# Altium PCB 6C-2L-1550um.PcbDoc
Units mm, origin at the board's own origin, x right, y up, seen from the top; angles counter-clockwise.
Board outline 52.6 x 53.3 mm, 2 copper layers (Top Layer, Bottom Layer), stack 1.586 mm thick; 35 components, 25 nets, 138 pads, 12 vias.
Unrouted connection lines stored in the file: 55.
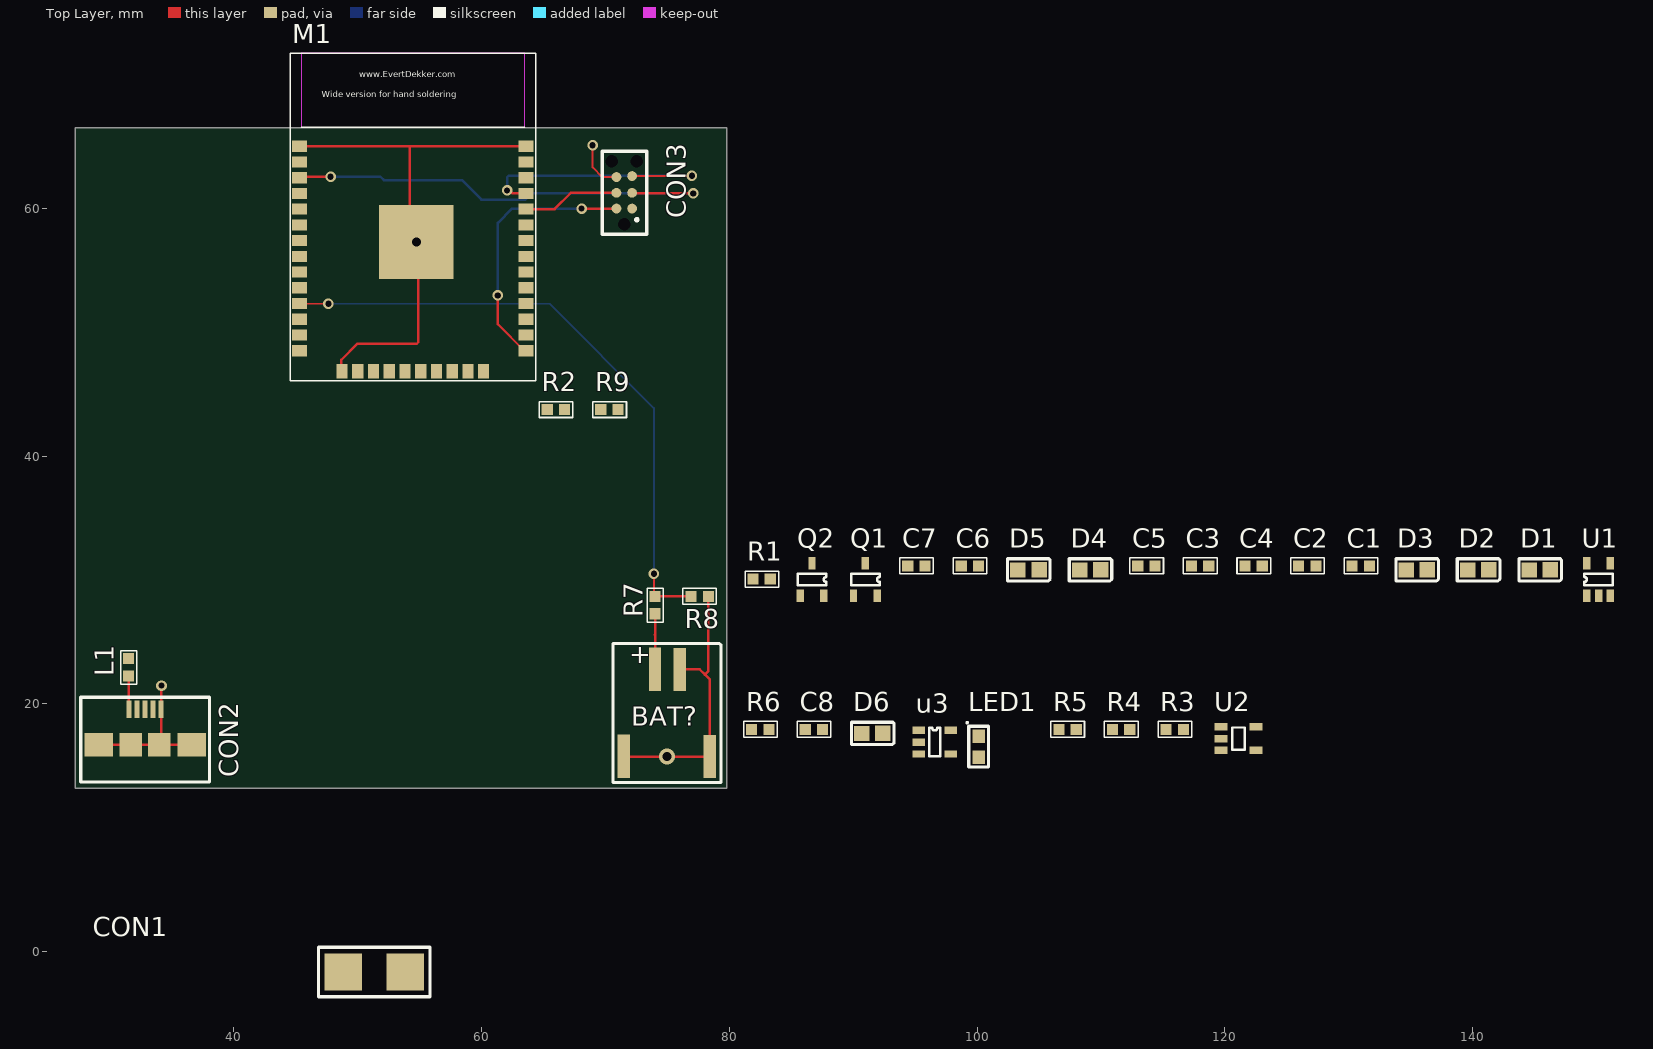
[diagram p0: Top Layer view]
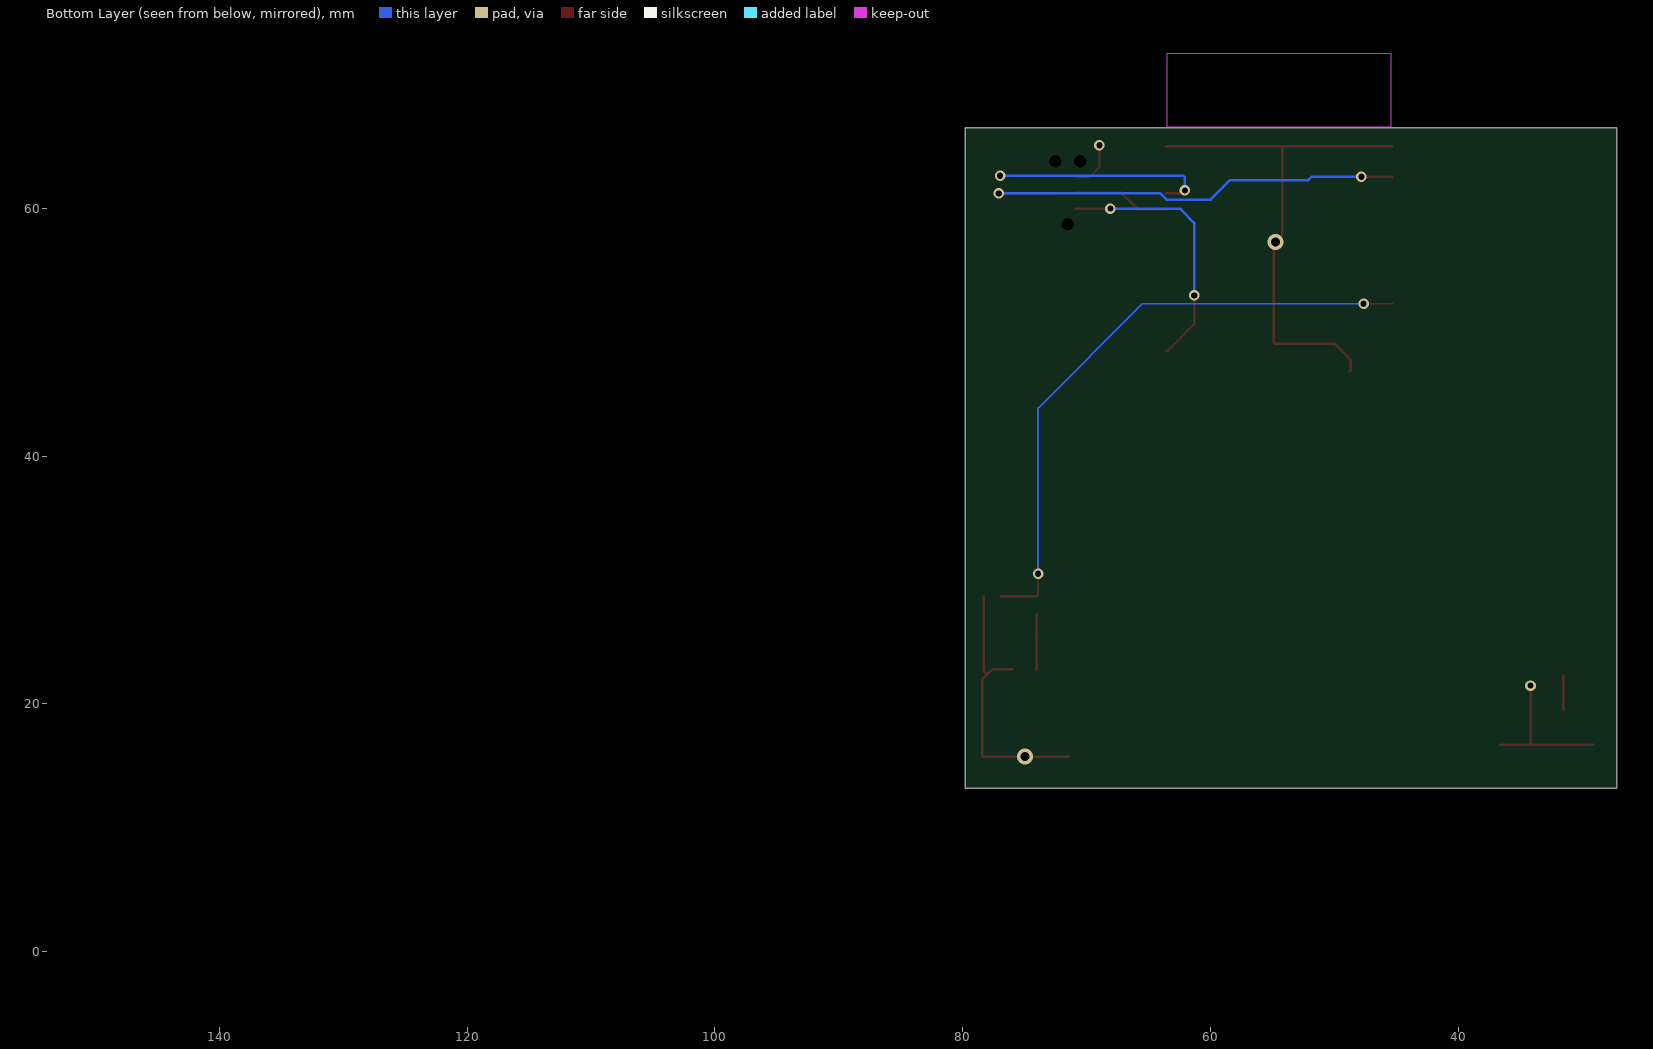
[diagram p1: Bottom Layer view, seen from below]

## Layer stack, top to bottom
Top Solder: solder mask 0.0102, Solder Resist, Dk 3.5
Top Layer: signal copper 0.018
Dielectric1: core 1.55, FR-4, Dk 4.8
Bottom Layer: signal copper 0.018
Bottom Solder: solder mask 0.0102, Solder Resist, Dk 3.5

## Board outline
27.2,13.2 27.2,66.5 79.8,66.5 79.8,13.2

## Design rules (kind name [scope] priority, off if disabled: settings)
BoardOutlineClearance [All] p1: gap=0.25 ignorepadtopadclearanceinfootprint=FALSE except(0: Arc-SplitContinuation Track-SplitContinuation SMDPad-SplitContinuation THPad-SplitContinuation Via-SplitContinuation Fill-SplitContinuation Poly-SplitContinuation Region-SplitContinuation Text-SplitContinuation)
Clearance Clearance-xPP-xTP-xTT [All] p1: gap=0.15 ignorepadtopadclearanceinfootprint=FALSE except(0: Arc-Hole Track-Hole SMDPad-Hole THPad-Hole Via-Hole Fill-Hole Poly-Hole Region-Hole Text-Hole)
ComponentClearance [All] p1: gap=0.25 collisioncheckmode=3 verticalgap=0.25 showdistances=FALSE
DiffPairsRouting [All] p1: maxlimit=0.25 minlimit=0.25 mostfreqgap=0.25 toplayer_minwidth=0.381 toplayer_maxwidth=0.381 toplayer_prefwidth=0.381 bottomlayer_minwidth=0.381 bottomlayer_maxwidth=0.381 bottomlayer_prefwidth=0.381 maxuncoupledlength=12.5
Height [All] p1: minheight=0 maxheight=25 prefheight=12.5
HoleSize HoleSize-PTH [All] p1: absolutevalues=TRUE maxlimit=2 minlimit=0.25 maxpercent=80.000 minpercent=20.000
HoleToHoleClearance [All] p1: gap=0.35 allowstackedmicrovias=TRUE
MinimumAnnularRing "Minimum IAR  >0.45mm" [((ObjectKind = 'Pad') OR (ObjectKind = 'Via')) And (Layer = 'MultiLayer') And (HoleDiameter > AsMM(0.45))] p1: minimumring=0.175 // minimum inner annular ring for pads > 0.45mm finished hole size
MinimumAnnularRing "Minimum IAR <=0.45mm" [((ObjectKind = 'Pad') OR (ObjectKind = 'Via')) And (Layer = 'MultiLayer') And (HoleDiameter <= AsMM(0.45))] p2: minimumring=0.175 // minimum inner annular ring for pads <= 0.45mm finished hole size
MinimumSolderMaskSliver [All] p1: minsoldermaskwidth=0.08
PlaneClearance PlaneClearance-IPI [All] p1: clearance=0.25
PlaneConnect [All] p1: planeconnectstyle=Relief reliefexpansion=0.175 reliefentries=4 reliefconductorwidth=0.2 reliefairgap=0.2
PolygonConnect PolygonConnect-xTW [All] p1: connectstyle=Relief reliefconductorwidth=0.2 reliefentries=4 polygonreliefangle="90 Angle" airgapwidth=0.2
RoutingCorners [All] p1: cornerstyle=45-Degree minsetback=2.5 maxsetback=2.5
RoutingVias "RoutingVias > 0.45mm" [(ObjectKind = 'Via') And (HoleDiameter > AsMM(0.45))] p1: holewidth=0.5 width=0.85 viastyle="Through Hole" minholewidth=0.5 minwidth=0.85 maxholewidth=0.9 maxwidth=1.25 // finishet hole size > 0.45mm
RoutingVias "RoutingVias <= 0.45mm" [(ObjectKind = 'Via') And (HoleDiameter <= AsMM(0.45))] p2: holewidth=0.3 width=0.65 viastyle="Through Hole" minholewidth=0.25 minwidth=0.6 maxholewidth=0.45 maxwidth=0.8 // finishet hole size <= 0.45mm
SilkToSilkClearance [All] p1: silktosilkclearance=0.2
SilkToSolderMaskClearance SilkscreenOverComponentPads [IsPad] p1: minsilkscreentomaskgap=0.2 clearancetoexposedcopper=TRUE
SolderMaskExpansion [All] p1: expansion=0 istentingtop=FALSE
UnRoutedNet [All] p1: checkbadconnections=TRUE
Width Width-xTW [All] p1: maxlimit=1.5 minlimit=0.15 preferedwidth=0.2
18 further rules are at their usual default settings.

## Classes and differential pairs
component class voeding: C1 C2 C3 C4 C5 C6 C7 CON1 D1 D2 D3 D4 D5 Q1 Q2 R1 U1
component class Designator: CON3 M1 R2 R9
component class charger: BAT? C8 CON2 D6 L1 LED1 R3 R4 R5 R6 R7 R8 U2 u3

## Components (designator, comment, footprint, x,y, rotation, side; value= is the part's Value field where it differs from the comment)
BAT? "batery" "jst 2pin" 73.975,22.775 r0 top
C1 "0,022uF" 0603 130.269,31.139 r0 top
C2 "470pF" 0603 125.943,31.139 r0 top
C3 "10uF" 0603 117.293,31.139 r0 top
C4 "10uF" 0603 121.618,31.139 r0 top
C5 "0,022uF" 0603 112.968,31.139 r0 top
C6 "47nF" 0603 98.717,31.139 r0 top
C7 "47nF" 0603 94.392,31.139 r0 top
C8 "10uF" 0603 86.116,17.938 r0 top
CON1 "screw connector" "qi coil" 48.825,-1.65 r0 top
CON2 "USB" microusb 32.825,18.125 r0 top
CON3 "Tagconnect" Tagconnect 71.479,61.254 r90 top
D1 "MBR0540-TP" Diode 145.419,30.814 r0 top
D2 "MBR0540-TP" Diode 140.444,30.814 r0 top
D3 "MBR0540-TP" Diode 135.494,30.814 r0 top
D4 "MBR0540-TP" Diode 109.118,30.814 r0 top
D5 "MBR0540-TP" Diode 104.142,30.814 r0 top
D6 "FC4SDCBMF6.0-T1" Diode 91.542,17.613 r0 top
L1 "ferite bead" 0603 31.5,23.65 r270 top
LED1 "LED" LED 100.117,16.538 r90 top
M1 "ESP32S_Module" ESP32S_W 54.444,55.935 r0 top
Q1 "2N7002ET1G" "N-channel FET" 91.067,30.039 r0 top
Q2 "2N7002ET1G" "N-channel FET" 86.766,30.039 r0 top
R1 "10K" 0603 81.9,30.075 r0 top
R2 "1k" 0603 65.291,43.763 r0 top
R3 "1k" 0603 115.243,17.938 r0 top
R4 "1k" 0603 110.918,17.938 r0 top
R5 "1k" 0603 106.592,17.938 r0 top
R6 "1k" 0603 81.791,17.938 r0 top
R7 "100K" 0603 74,28.675 r270 top
R8 "100K" 0603 78.3,28.675 r180 top
R9 "1k" 0603 69.616,43.763 r0 top
U1 "MCP1755T-500E/OT" "AP2112 sot25" 149.895,30.039 r0 top
U2 "MCP73831" MCP73831/2 121.093,17.188 r0 top
u3 "ap2112 SOT25" "AP2112 sot25" 96.575,17.175 r270 top

## Footprints (in the part's own frame and the unit in brackets; to place one, negate y for a bottom-side part, rotate by r counter-clockwise, add the part's x,y. Pads: shape width x height; smd on the part's side, far side on the other; paste and mask are expansions set on the pad)
0603 [mm]
  rect 0.9x0.9 smd: 1(0,0) 2(1.4,0)
  silkscreen extent -0.64,-0.65 2.07,0.64, body extent -0.03,-0.38 1.57,0.42, height 0.3
"AP2112 sot25" [mm]
  round 0.2 on Top Overlay: 1(-1.225,-0.55)
  rect 0.6x1 smd: 1(-0.675,-1.3) 2(0.275,-1.3) 3(1.225,-1.3) 4(1.225,1.3) 5(-0.675,1.3)
  silkscreen extent -0.87,-0.45 1.43,0.45, body extent -1.19,-1.17 1.74,1.17, height 1
Diode [mm]
  rect 1.25x1.22 smd: 1(-0.85,0)
  rect 1.25x1.25 smd: 2(0.85,0)
  silkscreen extent -1.69,-0.9 1.75,0.9
ESP32S_W [mm] "Esp32S Module wide for hand soldering"
  rect 1.2x0.9 smd: 1(-9.144,9.08) 2(-9.144,7.81) 3(-9.144,6.54) 4(-9.144,5.271) 5(-9.144,4) 6(-9.144,2.73) 7(-9.144,1.46) 8(-9.144,0.191) 9(-9.144,-1.079) 10(-9.144,-2.349) 11(-9.144,-3.619) 12(-9.144,-4.889) 13(-9.144,-6.159) 14(-9.144,-7.429) 25(9.144,-7.429) 26(9.144,-6.159) 27(9.144,-4.889) 28(9.144,-3.619) 29(9.144,-2.349) 30(9.144,-1.079) 31(9.144,0.191) 32(9.144,1.46) 33(9.144,2.73) 34(9.144,4) 35(9.144,5.271) 36(9.144,6.54) 37(9.144,7.81) 38(9.144,9.08)
  rect 0.9x1.2 smd: 15(-5.715,-9.08) 16(-4.447,-9.08) 17(-3.177,-9.08) 18(-1.907,-9.08) 19(-0.637,-9.08) 20(0.633,-9.08) 21(1.903,-9.08) 22(3.173,-9.08) 23(4.443,-9.08) 24(5.713,-9.08)
  rect 6x6 smd: 101(0.283,1.346)
  Keep-Out Layer region: -9.017,10.604 9.017,10.604 9.017,16.573 -9.017,16.573
  silkscreen extent -9.91,-9.84 9.91,16.57, body extent -8.98,-8.89 9.02,16.61, height 3.25
"jst 2pin" [mm] "jst 2 pin battery connector"
  rect 1x3.5 smd: 1(0.016,0.002) 2(-2.52,-7.01) 2(2,0) 2(4.45,-7.03)
  silkscreen extent -3.38,-9.14 5.35,2.1, body extent -3.2,-8.17 4.95,0.09, height 5.38
LED [mm]
  rect 1.1x1 smd: 1(-0.85,0) 2(0.85,0)
  silkscreen extent -1.65,-0.8 1.97,0.95, body extent -0.8,-0.4 0.8,0.4, height 0.6
MCP73831/2 [mm] "MCP73831/2 ) sot23-5"
  rect 1.05x0.6 smd: 1(-1.425,0.95) 2(-1.425,0) 3(-1.425,-0.95) 4(1.425,-0.95) 5(1.425,0.95)
  silkscreen extent -0.5,-0.9 0.5,0.9, body extent -1.6,-1.45 1.2,1.45, height 1.45
microusb [mm]
  rect 0.4x1.4 smd: 1(-1.3,1.425) 2(-0.65,1.425) 3(0,1.425) 4(0.65,1.425) 5(1.3,1.425)
  rect 2.3x1.9 smd: 5(-3.75,-1.425) 5(3.75,-1.425)
  rect 1.8x1.9 smd: 5(-1.15,-1.425) 5(1.15,-1.425)
  silkscreen extent -5.19,-4.43 5.21,2.4, body extent -4.03,-4.16 3.97,1.44, height 2.82
"N-channel FET" [mm] "1=gate 2=source 3=drain"
  rect 0.6x1 smd: 1(-1.05,-1.3) 2(0.85,-1.3) 3(-0.1,1.3)
  round 0.2 on Top Overlay: 1(1.05,0)
  silkscreen extent -1.25,-0.45 1.05,0.45, body extent -1.55,-1.4 1.35,1.4, height 1.3
"qi coil" [mm]
  rect 3x3 smd: 1(0,0) 2(5,0)
  silkscreen extent -2,-2 7,2, body extent -20.5,-91.5 32.5,1.45, height 2.04
Tagconnect [mm]
  round 0.9 hole 0.995 unplated: 0(-2.539,-0.031) 0(2.541,-1.047) 0(2.541,0.985)
  round 0.79 smd paste-0.39: 1(-1.269,-0.666) 2(-1.269,0.604) 3(0.001,-0.666) 4(0.001,0.604) 5(1.351,-0.666) 6(1.271,0.604)
  silkscreen extent -3.35,-1.85 3.36,1.75, body extent -4.79,-3 4.71,2.9, height 26.4

## Part data
C1 C2 C3 C4 C5 C6 C7 C8: library part capacitor
D1 D2 D3 D4 D5 D6: library part diode
L1: library part Spoel
M1: "Esp-32S", Datasheet=https://espressif.com/sites/default/files/documentation/esp_wroom_32_datasheet_en.pdf
Q1 Q2: library part fet
R1 R2 R3 R4 R5 R6 R7 R8 R9: library part resistor

## Via types
v1: diameter 0.85, hole 0.5, Top Layer to Bottom Layer, 10 vias
v2: diameter 1.27, hole 0.711, Top Layer to Bottom Layer, 2 vias

## Nets (pads, with @x,y where several pads share a name; then routed paths per layer and width w, separated by ;. In a path a pad name is that pad's centre, name@x,y a point inside that pad or via, vN(x,y) a via of type N, cw(c..) or ccw(c..) an arc to the next point about the centre after c; other vN are vias at no path point)
3V3: C8.1 CON3.1 M1.2 R2.1 R9.1 u3.5
5V: D1.1 U1.4 U1.5
EN: CON3.3 M1.3 R2.2 | length 37.7
  Top Layer w0.2: M1.3 45.375,62.55 v1(47.8,62.55) ; CON3.3 72.172,61.228 77.047,61.228 v1(77.075,61.2)
  Bottom Layer w0.2: v1(47.8,62.55) 51.825,62.55 52.1,62.275 58.4,62.275 59.975,60.7 63.525,60.7 64.025,61.2 v1(77.075,61.2)
GND: BAT?.2 C8.2 CON2.5 CON3.6 M1.1 M1.15 M1.38 M1.101 Q1.2 Q2.2 R1.2 R4.1 R8.1 U1.2 U2.2 u3.2 | length 80.9
  Top Layer w0.15: v1(68.95,65.1) 68.95,63.3 69.725,62.525 CON3.6
  Top Layer w0.2: CON2.5@29.075,16.7 31.675,16.7 CON2.5@33.975,16.7 ; v1(34.15,21.475) 34.138,21.462 34.138,19.563 34.125,19.55 34.125,16.85 CON2.5@33.975,16.7 ; CON2.5@36.575,16.7 CON2.5@33.975,16.7 ; M1.1 54.21,65.015 ; M1.15 48.721,46.854 48.675,46.9 48.675,47.775 49.975,49.075 54.758,49.075 54.875,49.192 54.875,57.133 v2(54.727,57.281) 54.21,57.798 54.21,65.015 ; M1.38 54.21,65.015 ; BAT?.2@71.455,15.765 71.475,15.745 78.425,15.745 78.425,21.95 78.012,22.363 ; BAT?.2@75.975,22.775 77.6,22.775 78.012,22.363 ; R8.1 78.3,22.65 78.012,22.363
  other v2: 74.95,15.745
GPIO0: CON3.2 M1.25 R9.2 | length 21.4
  Top Layer w0.2: v1(61.3,52.975) 61.3,50.643 63.438,48.505 M1.25 ; v1(68.06,59.985) CON3.2
  Bottom Layer w0.2: v1(61.3,52.975) 61.3,58.825 62.46,59.985 v1(68.06,59.985)
NetC1_1: C1.1 C5.1 C6.1
NetC1_2: C1.2 C5.2 CON1.2
NetC2_1: C2.1 D3.1 D4.2
NetC2_2: C2.2 C7.1 CON1.1 D2.1 D5.2
NetC3_1: C3.1 C4.1 D2.2 D3.2 U1.1@149.22,28.739 U1.3
NetC3_2: C3.2 C4.2 D4.1 D5.1
NetC6_2: C6.2 Q1.3
NetC7_2: C7.2 Q2.3
NetCON2_1: CON2.1 L1.2 | length 2.7
  Top Layer w0.2: L1.2 31.525,22.225 CON2.1
NetLED1_2: LED1.2 R5.2
NetM1_11: M1.11 R7.1 R8.2 | length 50.2
  Top Layer w0.15: M1.11 45.315,52.3 v1(47.625,52.3) ; v1(73.9,30.5) 73.9,28.775 R7.1
  Top Layer w0.2: R7.1 R8.2
  Bottom Layer w0.15: v1(47.625,52.3) 65.475,52.3 73.9,43.875 v1(73.9,30.5)
NetQ1_1: Q1.1@90.017,28.739 Q2.1@85.716,28.739 R1.1
NetR3_1: R3.1 U2.5
NetR3_2: R3.2 R4.2
NetR5_1: R5.1 U2.1
NetR6_1: R6.1 u3.3
RX: CON3.4 M1.34 | length 7.8
  Top Layer w0.2: M1.34 65.885,59.935 67.205,61.255 CON3.4
TX: CON3.5 M1.35 | length 22.5
  Top Layer w0.15: CON3.5 72.155,62.615 76.965,62.615 v1(76.975,62.625)
  Top Layer w0.2: v1(62.05,61.45) 62.226,61.45 62.471,61.205 M1.35
  Bottom Layer w0.2: v1(62.05,61.45) 62.05,62.508 62.167,62.625 v1(76.975,62.625)
VBAT: BAT?.1 D6.2 R6.2 R7.2 U2.3 u3.1@95.275,17.85 | length 4.5
  Top Layer w0.2: 73.975,25.575 74,25.6 ; BAT?.1 74,22.786 74,25.6 ; R7.2 74,25.6
VBUS: D1.2 D6.1 L1.1 LED1.1 U2.4
pads on no net: CON2.2 CON2.3 CON2.4 CON3.0 M1.4 M1.5 M1.6 M1.7 M1.8 M1.9 M1.10 M1.12 M1.13 M1.14 M1.16 M1.17 M1.18 M1.19 M1.20 M1.21 M1.22 M1.23 M1.24 M1.26 M1.27 M1.28 M1.29 M1.30 M1.31 M1.32 M1.33 M1.36 M1.37 Q1.1@92.117,30.039 Q2.1@87.816,30.039 U1.1@148.67,29.489 u3.1@96.025,18.4 u3.4

## Silkscreen, mask and mechanical layers (free items; w line width, h text height)
Mechanical 1:
  the board outline again, w0.254
  text ".Pcb_File_Name_No_Path" at 27.5,10 h1.52

## Text inside footprints (layer, text, board x,y; h text height)
BAT?: Top Overlay "+" at 71.909,23.285 h1.52
M1: Top Overlay "Wide version for hand soldering" at 47.078,68.952 h0.5; Top Overlay "www.EvertDekker.com" at 50.126,70.603 h0.5